# Altium PCB AD8367_AGC.PcbDoc
Units mil, origin at the board's own origin, x right, y up, seen from the top; angles counter-clockwise.
Board outline 1700 x 1810 mil, 2 copper layers (Top Layer, Bottom Layer); 52 components, 29 nets, 141 pads, 513 vias.
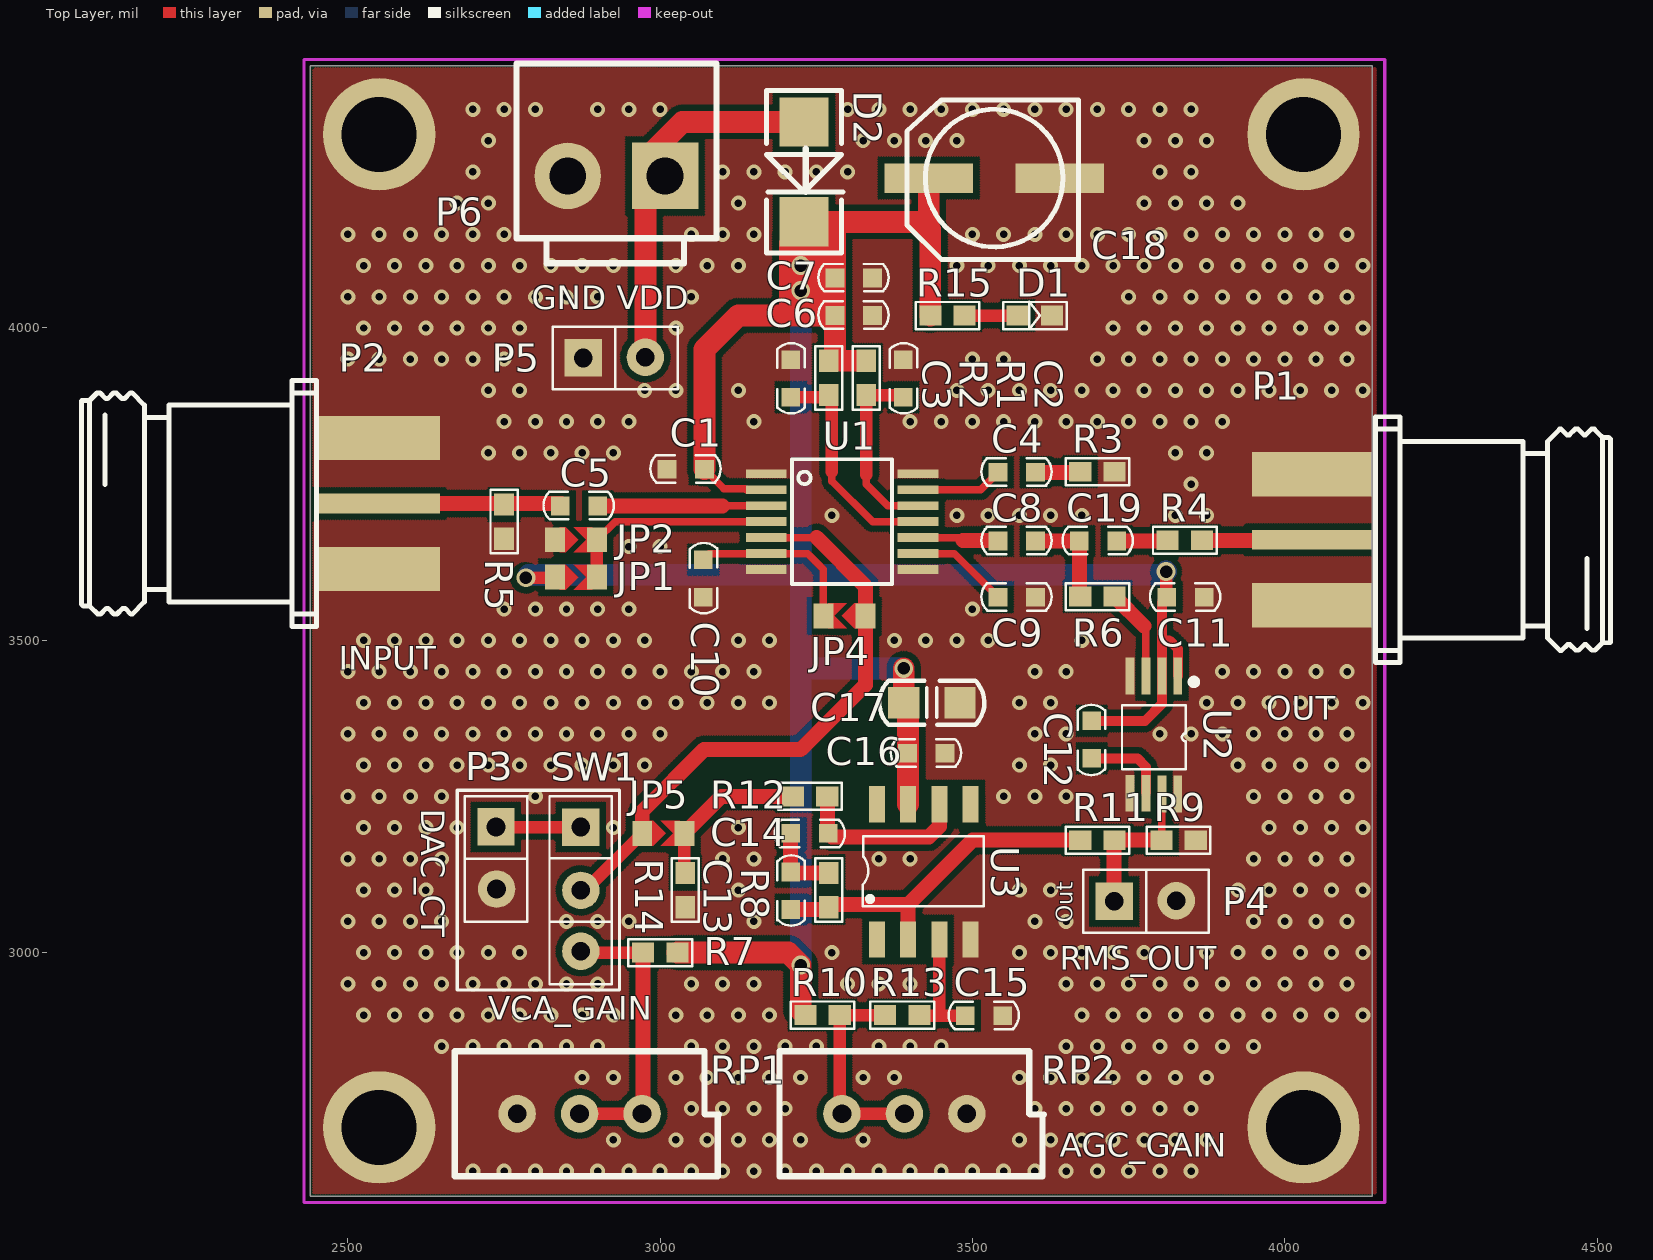
[diagram p0: Top Layer view]
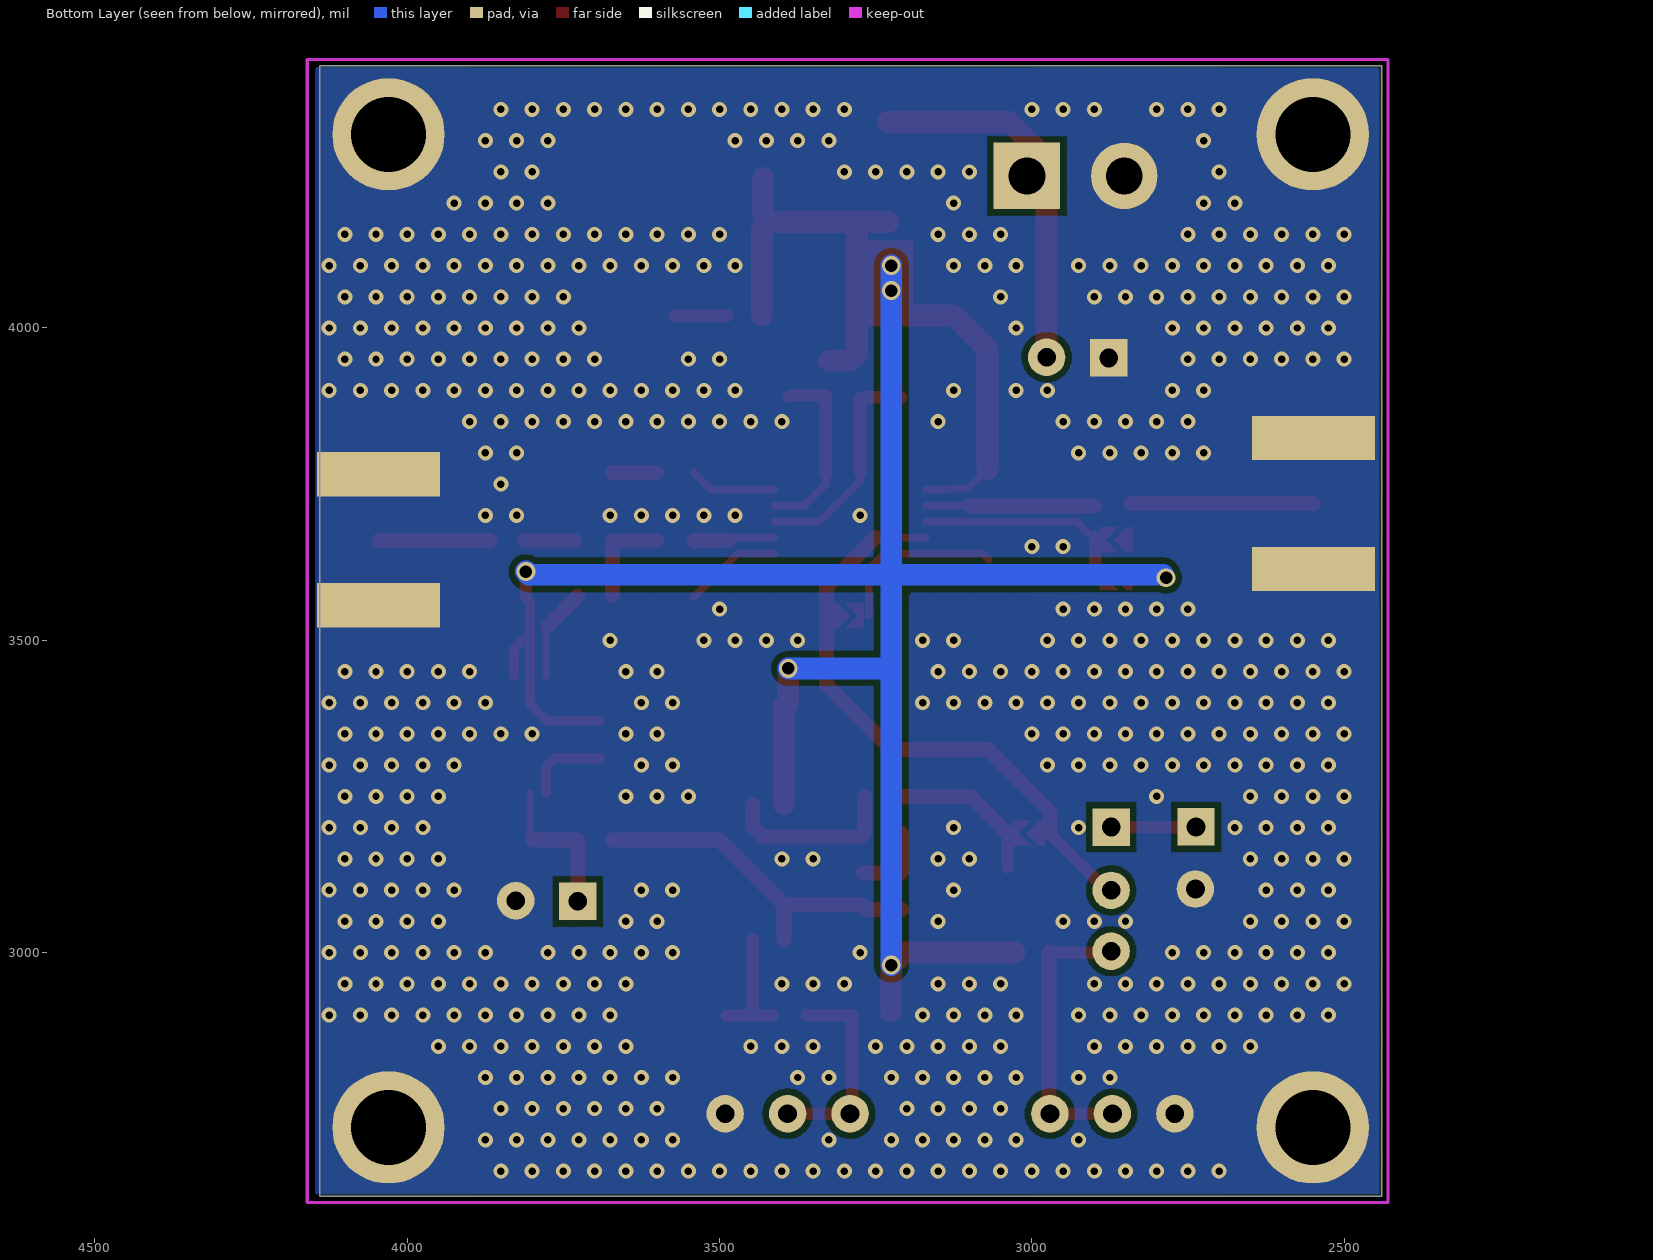
[diagram p1: Bottom Layer view, seen from below]
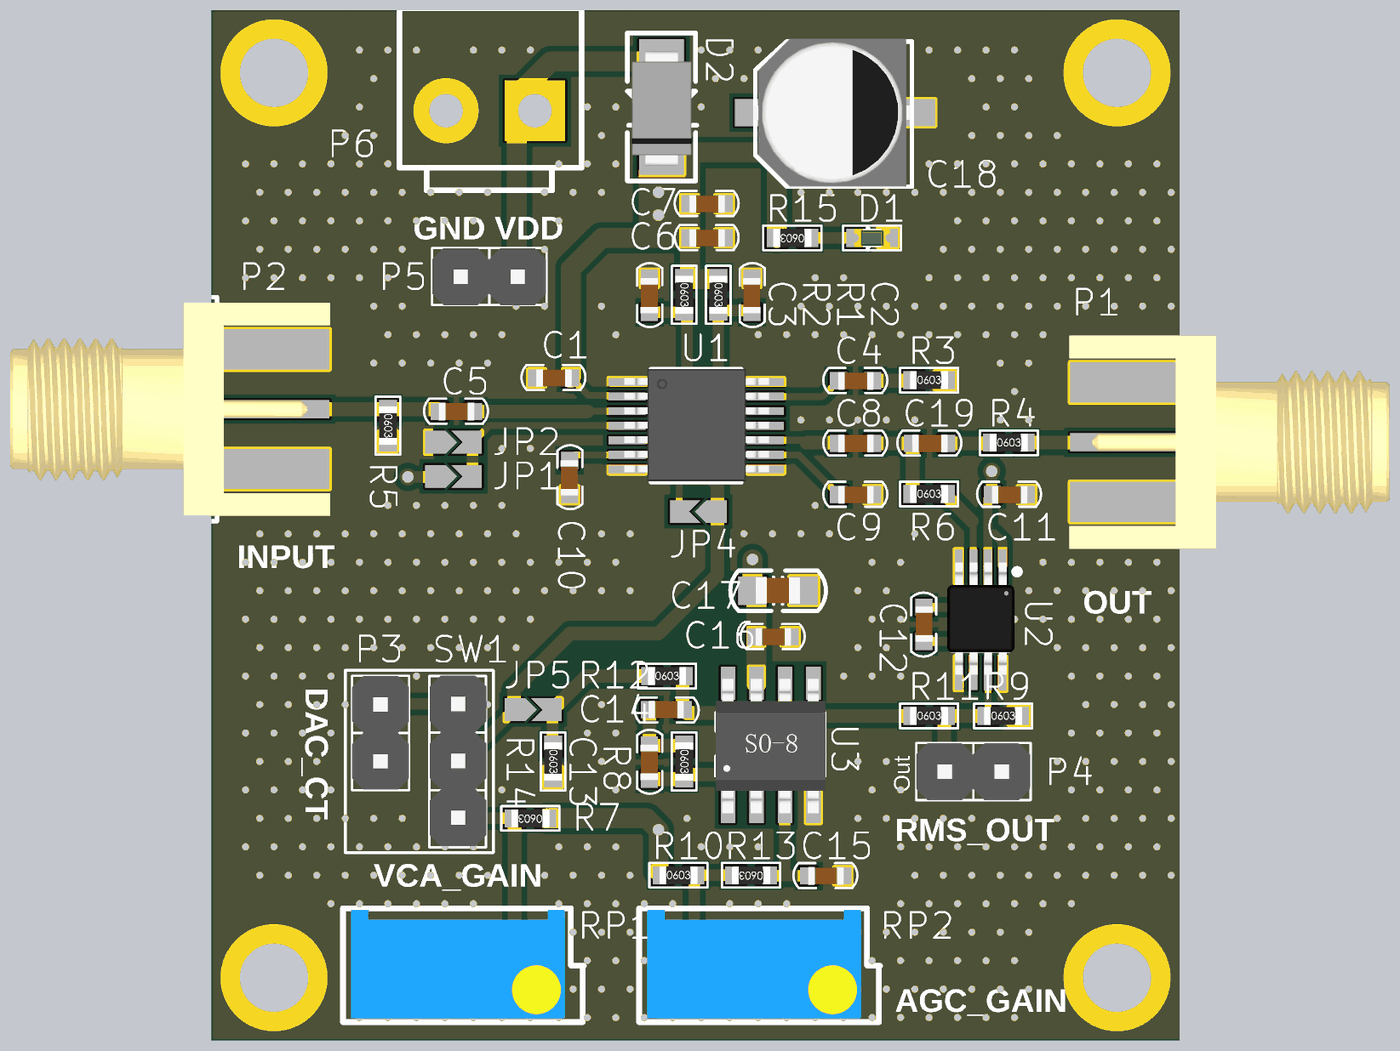
[diagram p2: 3D render of the assembled board from above, using the file's embedded part models]

## Layer stack, top to bottom
Top Solder: solder mask 0.4, Solder Resist, Dk 3.5
Top Layer: signal copper 1.4
Dielectric 1: dielectric 12.6, FR-4, Dk 4.8
Bottom Layer: signal copper 1.4
Bottom Solder: solder mask 0.4, Solder Resist, Dk 3.5

## Board outline
2440,2610 4140,2610 4140,4420 2440,4420

## Design rules (kind name [scope] priority, off if disabled: settings)
Clearance [All] p1: gap=10 ignorepadtopadclearanceinfootprint=FALSE except(0: Arc-Hole Track-Hole SMDPad-Hole THPad-Hole Via-Hole Fill-Hole Poly-Hole Region-Hole Text-Hole; 6: Arc-Arc Arc-Track Track-Track)
DiffPairsRouting [All] p1: maxlimit=10 minlimit=6 mostfreqgap=10 toplayer_minwidth=12 toplayer_maxwidth=15 toplayer_prefwidth=15 bottomlayer_minwidth=12 bottomlayer_maxwidth=15 bottomlayer_prefwidth=15 maxuncoupledlength=500
PolygonConnect [All] p1: connectstyle=Direct reliefconductorwidth=10 reliefentries=4 polygonreliefangle="90 Angle" airgapwidth=10
RoutingVias [All] p1: holewidth=28 width=50 viastyle="Through Hole" minholewidth=28 minwidth=50 maxholewidth=28 maxwidth=50
SolderMaskExpansion [All] p1: expansion=4
Width [All] p1: maxlimit=50 minlimit=10 preferedwidth=20 minimp=50.000000 maximp=50.000000 favimp=50.000000
29 further rules are at their usual default settings.

## Components (designator, comment, footprint, x,y, rotation, side; value= is the part's Value field where it differs from the comment)
C1 "1uF" C0603 3040,3775 r0 top
C2 "0.1uF" C0603 3390,3920 r270 top
C3 "0.1uF" C0603 3210,3920 r270 top
C4 "10nF" C0603 3570,3770 r0 top
C5 "0.1uF" C0603 2869,3716 r0 top
C6 "0.01uF" C0603 3309,4021 r0 top
C7 "100pF" C0603 3309,4081 r0 top
C8 "10nF" C0603 3570,3660 r0 top
C9 "10nF" C0603 3570,3570 r0 top
C10 "0.1uF" C0603 3070,3600 r270 top
C11 "0.01uF" C0603 3840,3570 r0 top
C12 "0.27uF" C0603 3690,3340 r90 top
C13 "20pF" C0603 3210,3100 r270 top
C14 "3.3nF" C0603 3240,3190 r180 top
C15 "0.1uF" C0603 3517.5,2900 r0 top
C16 "0.1uF" C0603 3425,3320 r0 top
C17 "4.7uF" C0805 3480,3400 r180 top
C18 "33uF/50V" C6.3*7.7 3420,4240 r0 top
C19 "0.1uF" C0603 3700,3660 r0 top
D1 "LED3" LED_GREEN_0603 3600,4020 r0 top
D2 "SS34" DO-214AC 3230,4330 r270 top
JP1 "Jump" JUMP 2870,3600 r180 top
JP2 "Jump/NC" JUMP 2870,3660 r180 top
JP4 "Jump/NC" JUMP 3290,3540 r0 top
JP5 "Jump" JUMP 3010,3190 r180 top
P1 "OUT" SMA_3D 4080,3660 r0 top
P2 "IN" SMA_3D 2515,3720 r180 top
P3 "Header 2" HDR1X2 2745,3148 r270 top
P4 "RMS" HDR1X2 3780,3090 r0 top
P5 "" HDR1X2 2930,3960 r0 top
P6 "HDR-1X2" VH3.96-LI-2P 2930.05,4243.5 r180 top
R1 "0Ω" R0603 3330,3920 r270 top
R2 "0Ω" R0603 3270,3920 r270 top
R3 "100Ω" R0603 3700,3770 r0 top
R4 "51Ω" R0603 3840,3660 r0 top
R5 "51Ω" R0603 2750,3690 r270 top
R6 "10R" R0603 3700,3570 r0 top
R7 "10kΩ" R0603 3000,3000 r180 top
R8 "82kΩ" R0603 3270,3100 r270 top
R9 "12K" R0603 3830,3180 r0 top
R10 "10kΩ" R0603 3260,2900 r0 top
R11 "150kΩ" R0603 3700,3180 r0 top
R12 "33kΩ" R0603 3240,3250 r0 top
R13 "50Ω" R0603 3387.5,2900 r180 top
R14 "10kΩ" R0603 3040,3100 r270 top
R15 "2kΩ" R0603 3460,4020 r180 top
RP1 "10k" RP_3296W 2880,2740 r0 top
RP2 "10kΩ" RP_3296W 3400,2740 r0 top
SW1 "Header3" HDR1X3 2870,3200 r90 top
U1 "AD8367" TSSOP14 3290,3690 r0 top
U2 "AD8361" MSOP8 3790,3350 r270 top
U3 "AD820" SOP-8 3420,3130 r90 top

## Footprints (in the part's own frame and the unit in brackets; to place one, negate y for a bottom-side part, rotate by r counter-clockwise, add the part's x,y. Pads: shape width x height; smd on the part's side, far side on the other; paste and mask are expansions set on the pad)
C6.3*7.7 [mm]
  rect 3.6x1.2 smd: 1(0.254,0) 2(5.588,0)
  silkscreen extent -0.64,-3.3 6.35,3.17, body extent -0.71,-3.3 6.29,3.3, height 5.41
C0603 [mil]
  rect 30x30 smd: 1(-29,-1) 2(31,-1)
  silkscreen extent -56,-22 57,22, body extent -30,-17 33,14, height 24
C0805 [mil]
  rect 50x50 smd: 1(0,0) 2(90,0)
  silkscreen extent -39,-36 129,36, body extent 6,-24 85,23, height 47
DO-214AC [mm]
  rect 2x2 smd: 1(0,0.006) 2(4.064,0.006)
  silkscreen extent -1.27,-1.52 5.33,1.58, body extent -0.46,-1.32 4.65,1.35, height 2.12
HDR1X2 [mil]
  rect 60x60 hole 30: 1(-53.15,-7.87)
  round 60 hole 30: 2(46.26,-6.89)
  silkscreen extent -102,-58 98,42, body extent -102,-58 98,42, height 336
HDR1X3 [mil]
  rect 60x60 hole 30: 1(0.98,-2.95)
  round 60 hole 30: 2(-100.39,-2.95) 3(-197.83,-2.95)
  silkscreen extent -251,-52 50,47, body extent -249,-53 51,47, height 336
JUMP [mil]
  rect 32x40 smd: 1(38.72,-0.97) 2(-28.78,-0.97)
  Top Layer region: -21.28,-0.97 -11.28,-0.97 8.72,-20.97 -21.28,-20.97
  Top Layer region: -21.28,-0.97 -11.28,-0.97 8.72,19.03 -21.28,19.03
  Top Layer region: 31,19 21,19 1,-1 21,-21 31,-21
LED_GREEN_0603 [mm]
  rect 0.9x0.8 smd: 1(-0.699,0) 2(0.699,0)
  silkscreen extent -1.3,-0.55 1.3,0.55, body extent -0.8,-0.4 0.8,0.4, height 0.6
MSOP8 [mm]
  rect 1.5x0.35 smd: 1(-2.365,0.989) 2(-2.365,0.339) 3(-2.365,-0.311) 4(-2.365,-0.961) 5(2.41,-0.961) 6(2.41,-0.311) 7(2.435,0.339) 8(2.435,0.989)
  silkscreen extent -2.24,-1.29 1.44,1.77, body extent -2.53,-1.47 2.55,1.53, height 0.85
R0603 [mm]
  rect 0.9x0.8 smd: 1(-0.699,0) 2(0.699,0)
  silkscreen extent -1.3,-0.55 1.3,0.55, body extent -0.85,-0.4 0.85,0.4, height 0.56
RP_3296W [mil]
  round 60 hole 30: 1(-109,2) 2(-9,2) 3(91,2)
  silkscreen extent -209,-98 214,102, body extent -195,-91 181,99, height 455
SMA_3D [mil]
  rect 196.85x31.5 smd: 1(-34,1)
  rect 196.85x70.87 smd: 2(-34,-104) 2(-34,106)
  rect 196.85x70.87 smd far side: 2(-34,-104) 2(-34,106)
  silkscreen extent 65,-196 442,198, body extent -134,-186 428,188, height 171
SOP-8 [mil]
  rect 58x25.59 smd: 1(-109.11,73) 2(-109.11,23) 3(-109.11,-27) 4(-109.11,-77) 5(107.43,-77) 6(107.43,-27) 7(107.43,23) 8(107.43,73)
  silkscreen extent -56,-98 56,96, body extent -121,-98 115,95, height 67
TSSOP14 [mil]
  rect 65x14 smd: 1(-119.98,76.77) 2(-119.98,51.18) 3(-119.98,25.59) 4(-119.98,0) 5(-119.98,-25.59) 6(-119.98,-51.18) 7(-119.98,-76.77) 8(122.73,-76.77) 9(122.73,-51.18) 10(122.73,-25.59) 11(122.73,0) 12(122.73,25.59) 13(122.73,51.18) 14(122.73,76.77)
  silkscreen extent -79,-100 81,100, body extent -125,-97 129,99, height 35
VH3.96-LI-2P [mm] "接插件，25V/5A"
  rect 2.7x2.7 hole 1.5: 1(-1.98,0)
  round 2.7 hole 1.5: 2(1.982,0)
  silkscreen extent -4.06,-4.57 4.07,3.56, body extent -3.98,-4.4 4.03,4.16, height 10.5

## Part data
C1 C2 C3 C4 C5 C6 C7 C8 C9 C10 C11 C12 C13 C14 C15 C16 C17 C19: library part "Cap Semi", "Capacitor (Semiconductor SIM Model)"
C18: library part "Cap Pol3_1", "Polarized Capacitor (Surface Mount)"
D1: "Typical BLUE SiC LED"
D2: library part D, "1N4148"
JP2 JP4: library part Jump
P1 P2: library part SMA
P3: "Header, 2-Pin"
P4 P5: library part "Header 2", "Header, 2-Pin"
P6: library part "Header 2", "2P接插件"
R1 R2 R3 R4 R5 R6 R7 R8 R9 R10 R11 R12 R13 R14 R15: library part Res2, "Resistor"
RP1 RP2: library part SW_A
SW1: library part SW
U3: library part 单运放1

## Free pads (board coordinates)
  round 180 hole 120: 0(2550,2720) 1(4030,2720) 2(4030,4310) 3(2550,4310)

## Via types
v1: diameter 24, hole 12, Top Layer to Bottom Layer, tented both sides, 507 vias
v2: diameter 30, hole 20, Top Layer to Bottom Layer, tented both sides, 6 vias

## Nets (pads, with @x,y where several pads share a name; then routed paths per layer and width w, separated by ;. In a path a pad name is that pad's centre, name@x,y a point inside that pad or via, vN(x,y) a via of type N, cw(c..) or ccw(c..) an arc to the next point about the centre after c; other vN are vias at no path point)
GND: C1.1 C2.1 C3.1 C6.2 C7.2 C9.2 C10.2 C11.2 C15.2 C16.2 C17.1 C18.2 D1.2 JP2.1 P1.2 P2.2 P3.2 P4.2 P5.1 P6.2 pad.0 pad.1 pad.2 pad.3 R3.2 R5.2 R9.2 R14.2 RP1.1 RP2.3 U1.1 U1.7 U1.8 U1.14 U2.4 U2.5 U2.8 U3.4
  other v1: 2700,2650 2750,2650 2800,2650 2850,2650 2900,2650 2950,2650 3000,2650 3050,2650 3100,2650 3150,2650 3200,2650 3250,2650 3300,2650 3350,2650 3400,2650 3450,2650 3500,2650 3550,2650 3600,2650 3650,2650 3700,2650 3750,2650 3800,2650 3850,2650 2925,2700 3025,2700 3075,2700 3125,2700 3175,2700 3225,2700 3325,2700 3575,2700 3625,2700 3675,2700 3725,2700 3775,2700 3825,2700 3875,2700 3050,2750 3100,2750 3150,2750 3200,2750 3600,2750 3650,2750 3700,2750 3750,2750 3800,2750 3850,2750 2875,2800 2925,2800 3025,2800 3075,2800 3125,2800 3175,2800 3225,2800 3325,2800 3375,2800 3575,2800 3625,2800 3675,2800 3725,2800 3775,2800 3825,2800 3875,2800 2650,2850 2700,2850 2750,2850 2800,2850 2850,2850 2900,2850 3050,2850 3100,2850 3150,2850 3200,2850 3250,2850 3350,2850 3400,2850 3450,2850 3650,2850 3700,2850 3750,2850 3800,2850 3850,2850 3900,2850 3950,2850 2525,2900 2575,2900 2625,2900 2675,2900 2725,2900 2775,2900 2825,2900 2875,2900 2925,2900 3025,2900 3075,2900 3125,2900 3175,2900 3675,2900 3725,2900 3775,2900 3825,2900 3875,2900 3925,2900 3975,2900 4025,2900 4075,2900 4125,2900 2500,2950 2550,2950 2600,2950 2650,2950 2700,2950 2750,2950 2800,2950 2850,2950 2900,2950 3050,2950 3100,2950 3150,2950 3300,2950 3350,2950 3400,2950 3650,2950 3700,2950 3750,2950 3800,2950 3850,2950 3900,2950 3950,2950 4000,2950 4050,2950 4100,2950 2525,3000 2575,3000 2625,3000 2675,3000 2725,3000 2775,3000 3275,3000 3575,3000 3625,3000 3675,3000 3725,3000 3775,3000 3875,3000 3925,3000 3975,3000 4025,3000 4075,3000 4125,3000 2500,3050 2550,3050 2600,3050 2650,3050 2850,3050 2900,3050 2950,3050 3150,3050 3600,3050 3650,3050 3950,3050 4000,3050 4050,3050 4100,3050 2525,3100 2575,3100 2625,3100 3125,3100 3575,3100 3625,3100 3925,3100 3975,3100 4025,3100 4075,3100 4125,3100 2500,3150 2550,3150 2600,3150 2650,3150 3100,3150 3150,3150 3350,3150 3400,3150 3950,3150 4000,3150 4050,3150 4100,3150 2525,3200 2575,3200 2625,3200 2675,3200 2925,3200 3125,3200 3975,3200 4025,3200 4075,3200 4125,3200 2500,3250 2550,3250 2600,3250 2650,3250 2800,3250 3550,3250 3600,3250 3650,3250 3950,3250 4000,3250 4050,3250 4100,3250 2525,3300 2575,3300 2625,3300 2675,3300 2725,3300 2775,3300 2825,3300 2875,3300 2925,3300 2975,3300 3575,3300 3625,3300 3925,3300 3975,3300 4025,3300 4075,3300 4125,3300 2500,3350 2550,3350 2600,3350 2650,3350 2700,3350 2750,3350 2800,3350 2850,3350 2900,3350 2950,3350 3000,3350 3600,3350 3650,3350 3800,3350 3850,3350 3900,3350 3950,3350 4000,3350 4050,3350 4100,3350 2525,3400 2575,3400 2625,3400 2675,3400 2725,3400 2775,3400 2825,3400 2875,3400 2925,3400 2975,3400 3025,3400 3075,3400 3125,3400 3175,3400 3575,3400 3625,3400 3875,3400 3925,3400 3975,3400 4025,3400 4075,3400 4125,3400 2500,3450 2550,3450 2600,3450 2650,3450 2700,3450 2750,3450 2800,3450 2850,3450 2900,3450 2950,3450 3000,3450 3050,3450 3100,3450 3150,3450 3600,3450 3650,3450 3900,3450 3950,3450 4000,3450 4050,3450 4100,3450 2525,3500 2575,3500 2625,3500 2675,3500 2725,3500 2775,3500 2825,3500 2875,3500 2925,3500 2975,3500 3125,3500 3175,3500 3375,3500 3425,3500 3475,3500 3525,3500 3675,3500 2750,3550 2800,3550 2850,3550 2900,3550 2950,3550 3500,3550 2950,3650 3000,3650 3275,3700 3475,3700 3525,3700 3575,3700 3625,3700 3675,3700 3825,3700 3875,3700 3850,3750 2725,3800 2775,3800 2825,3800 2875,3800 2925,3800 3825,3800 3875,3800 2750,3850 2800,3850 2850,3850 2900,3850 2950,3850 3150,3850 3400,3850 3450,3850 3500,3850 3550,3850 3600,3850 3650,3850 3700,3850 3750,3850 3800,3850 3850,3850 3900,3850 2725,3900 2775,3900 2975,3900 3025,3900 3125,3900 3475,3900 3525,3900 3575,3900 3625,3900 3675,3900 3725,3900 3775,3900 3825,3900 3875,3900 3925,3900 3975,3900 4025,3900 4075,3900 4125,3900 2500,3950 2550,3950 2600,3950 2650,3950 2700,3950 2750,3950 3500,3950 3550,3950 3700,3950 3750,3950 3800,3950 3850,3950 3900,3950 3950,3950 4000,3950 4050,3950 4100,3950 2525,4000 2575,4000 2625,4000 2675,4000 2725,4000 2775,4000 3025,4000 3725,4000 3775,4000 3825,4000 3875,4000 3925,4000 3975,4000 4025,4000 4075,4000 4125,4000 2500,4050 2550,4050 2600,4050 2650,4050 2700,4050 2750,4050 2800,4050 2850,4050 2900,4050 3050,4050 3750,4050 3800,4050 3850,4050 3900,4050 3950,4050 4000,4050 4050,4050 4100,4050 2525,4100 2575,4100 2625,4100 2675,4100 2725,4100 2775,4100 2825,4100 2875,4100 2925,4100 3025,4100 3075,4100 3125,4100 3475,4100 3525,4100 3575,4100 3625,4100 3675,4100 3725,4100 3775,4100 3825,4100 3875,4100 3925,4100 3975,4100 4025,4100 4075,4100 4125,4100 2500,4150 2550,4150 2600,4150 2650,4150 2700,4150 2750,4150 3050,4150 3100,4150 3150,4150 3500,4150 3550,4150 3600,4150 3650,4150 3700,4150 3750,4150 3800,4150 3850,4150 3900,4150 3950,4150 4000,4150 4050,4150 4100,4150 2675,4200 2725,4200 3125,4200 3775,4200 3825,4200 3875,4200 3925,4200 2700,4250 3100,4250 3150,4250 3200,4250 3250,4250 3300,4250 3800,4250 3850,4250 2725,4300 3325,4300 3375,4300 3425,4300 3475,4300 3775,4300 3825,4300 3875,4300 2700,4350 2750,4350 2800,4350 2900,4350 2950,4350 3000,4350 3300,4350 3350,4350 3400,4350 3450,4350 3500,4350 3550,4350 3600,4350 3650,4350 3700,4350 3750,4350 3800,4350 3850,4350
NetC2_2: C2.2 R1.2 U1.12 | length 299.9
  Top Layer w12: 3330,3765 3330,3750 3364.41,3715.59 U1.12
  Top Layer w20: 3330,3765 R1.2 3385.5,3892.5 C2.2
NetC3_2: C3.2 R2.2 U1.11 | length 366.7
  Top Layer w12: 3275,3770 3275,3755 3340,3690 U1.11
  Top Layer w20: C3.2 3266.5,3889 R2.2@3275,3880.5 ; 3275,3770 R2.2@3275,3880.5 ; R2.2@3275,3887.5 R2.2@3275,3880.5
NetC4_1: C4.1 U1.13 | length 139.8
  Top Layer w12: U1.13 3513.18,3741.18 C4.1
NetC4_2: C4.2 R3.1 | length 70.5
  Top Layer w24: C4.2 R3.1@3671.5,3769
NetC5_1: C5.1 P2.1 R5.1 | length 292
  Top Layer w24: P2.1 C5.1@2841,3719
NetC5_2: C5.2 U1.3 | length 271.1
  Top Layer w12: C5.2 C5.2@2900.3,3715.3 ; 3100,3715 3100.59,3715.59 U1.3 U1.3@3169.72,3715.3
  Top Layer w24: C5.2 3100,3715
NetC8_1: C8.1 U1.10 | length 130.5
  Top Layer w12: U1.10 3480.59,3664.41 3485,3660
  Top Layer w24: 3485,3660 3540,3660 C8.1
NetC8_2: C8.2 C19.1 R6.1 | length 157.5
  Top Layer w24: C8.2 C19.1 R6.1@3671,3571.5
NetC9_1: C9.1 U1.9 | length 157.2
  Top Layer w12: U1.9 3471.18,3638.82 C9.1
NetC10_1: C10.1 JP4.2 U1.6 | length 281.4
  Top Layer w12: C10.1 3078.82,3638.82 U1.6 3236.18,3638.82 3261.22,3613.78 JP4.2
NetC12_1: C12.1 U2.6 | length 134.6
  Top Layer w16: C12.1 3764,3311 3777.77,3297.23 U2.6
NetC13_1: C13.1 C14.2 R8.1 | length 121.5
  Top Layer w24: C13.1 C14.2 ; C13.1@3210.5,3127.5 R8.1
NetC13_2: C13.2 R8.2 R11.1 U3.2 | length 559.2
  Top Layer w20: R8.2@3266.5,3069 R8.2
  Top Layer w24: C13.2 R8.2@3266.5,3069 ; R8.2@3274.5,3077 3397,3077 ; U3.2 3397,3077 ; R11.1 3500,3180 3397,3077
NetC14_1: C14.1 R12.2 U3.6 | length 280.5
  Top Layer w24: C14.1@3267.5,3192.5 R12.2 ; C14.1 3275,3185 3430,3185 3447,3202 U3.6
NetC15_1: C15.1 R13.1 U3.3 | length 194.8
  Top Layer w20: R13.1 3416,2899 3446,2899 ; U3.3 3447,2899 C15.1
NetC19_2: C19.2 R4.1 | length 80.5
  Top Layer w24: C19.2 R4.1@3811.5,3659
NetD1_1: D1.1 R15.1 | length 85
  Top Layer w20: R15.1 D1.1
NetD2_1: D2.1 P5.2 P6.1 | length 595.9
  Top Layer w35: P5.2 2976.26,4270.26 3026,4320 3036,4330 D2.1
NetJP1_2: JP1.2 JP2.2 U1.4 | length 343.3
  Top Layer w12: JP2.2 2927.81,3690 U1.4
  Top Layer w20: JP1.2 JP2.2@2898.78,3655.97 ; JP2.2 JP2.2@2898.78,3665.97
NetJP4_1: JP4.1 JP5.1 SW1.2 U1.5 | length 961.4
  Top Layer w12: U1.5 3250.59,3664.41
  Top Layer w20: SW1.2 2879.92,3099.61 JP5.1
  Top Layer w24: JP5.1 2971.28,3226.28 3070,3325 3225,3325 3328.72,3428.72 JP4.1 3328.72,3586.28 3250.59,3664.41
NetJP5_2: JP5.2 R12.1 R14.1 | length 252.9
  Top Layer w20: R14.1@3038.78,3136.28 JP5.2
  Top Layer w24: JP5.2 3097.81,3250 R12.1
NetP1_1: P1.1 R4.2 | length 178.5
  Top Layer w24: R4.2 P1.1@4046,3660
NetP3_1: P3.1 SW1.1 | length 135.7
  Top Layer w20: P3.1@2737.29,3200.98 SW1.1
NetP4_1: P4.1 R9.1 R11.2 U2.7 | length 249
  Top Layer w12: R9.1@3799.14,3180 R9.1@3800,3180.86 ; R9.1@3803.36,3180.86 R9.1@3800,3180.86 ; U2.7 3803.36,3184.23 R9.1@3800,3180.86
  Top Layer w24: P4.1 3726.85,3179.35 R11.2 R9.1@3799.14,3180
NetR6_2: R6.2 U2.3 | length 145.2
  Top Layer w12: 3775,3520 3777.77,3517.23 U2.3
  Top Layer w24: R6.2 3775,3522.5
NetR7_2: R7.2 RP1.2 RP1.3 SW1.3 | length 456
  Top Layer w20: RP1.2 RP1.3 RP1.3@2972.5,2743.5 ; SW1.3@2875.12,3000 R7.2
  Top Layer w24: RP1.3@2972.5,2743.5 R7.2
NetR10_2: R10.2 R13.2 RP2.1 RP2.2 | length 331.9
  Top Layer w20: R13.2 R10.2 3287.5,2745.5 RP2.1 RP2.2
VDD: C1.2 C6.1 C7.1 C11.1 C12.2 C16.1 C17.2 C18.1 D2.2 JP1.1 R1.1 R2.1 R7.1 R10.1 R15.2 U1.2 U2.1 U2.2 U3.7 | length 4470.6
  Top Layer w12: C1.2 3102,3743 3136.01,3743 3137.83,3741.18 U1.2
  Top Layer w16: C12.2 3776,3371 3803.36,3398.36 U2.2 3803.36,3500 ; C11.1 3803.36,3561.36 3803.36,3500 ; U2.1 3828.95,3486.05 3815,3500 3803.36,3500
  Top Layer w20: v2(2785,3600) JP1.1@2830.31,3600 ; R10.1@3225,2907.5 R10.1 ; C17.2 C17.2@3397,3393 ; C11.1@3810,3570 v2(3810,3610)
  Top Layer w35: R7.1 3205,3000 v2(3225,2980) R10.1@3225,2907.5 ; C1.2 3071,3966 3125,4020 C6.1 ; D2.2 3280,4170 ; R1.1@3324.5,3947.5 3290,3947.5 3280,3957.5 C6.1 ; C17.2 v2(3390,3455) ; U3.7 C17.2@3397,3393 ; 3430,4180 C18.1 ; R15.2 3432.5,4157.5 3420,4170 3280,4170 ; C6.1 C7.1 3280,4170
  Bottom Layer w35: v2@2790,3605 3225,3605 ; v2(3225,2980) 3225,3605 ; v2(3225,4100) v2(3225,4060) 3225,3605 ; 3230,3455 v2(3390,3455) ; v2(3810,3610) 3805,3605 3225,3605
pads on no net: U3.1 U3.5 U3.8

## Polygon pours and split planes (outlines as drawn)
GND on Top Layer "Top Layer-GND" (hatched 90Degree grid 4 track 5, remove dead copper, pour order 0): 2430,4430 4160,4430 4160,2600 2430,2600
GND on Bottom Layer "Bottom Layer-GND" (hatched 90Degree grid 4 track 5, remove dead copper, pour order 2): 2430,4430 4160,4430 4160,2600 2430,2600

## Keep-outs
Keep-Out Layer:
  lines w5: 2430,2600 4160,2600 4160,4430 2430,4430 2430,2600

## Other copper
Top Layer:
  rectangle net VDD: 3190,4005 3290,4140

## Silkscreen, mask and mechanical layers (free items; w line width, h text height)
Top Overlay:
  lines w5: 2675,2940 2935,2940 2935,3260 2675,3260 2675,2940
  text "GND VDD" at 2794,4017.5 h65
  text "INPUT" at 2485,3440 h65
  text "OUT" at 3970,3360 h65
  text "DAC_CT" at 2605,3230 h65 r270
  text "Out" at 3669.5,3048 h45 r90
  text "RMS_OUT" at 3640,2960 h65
  text "VCA_GAIN" at 2725,2880 h65
  text "AGC_GAIN" at 3640,2660 h65